# Altium PCB Microscope_Lamp.PcbDoc
Units mm, origin at the board's own origin, x right, y up, seen from the top; angles counter-clockwise.
Board outline 100 x 100 mm, 2 copper layers (Top Layer, Bottom Layer), stack 1.621 mm thick; 45 components, 38 nets, 209 pads, 36 vias.
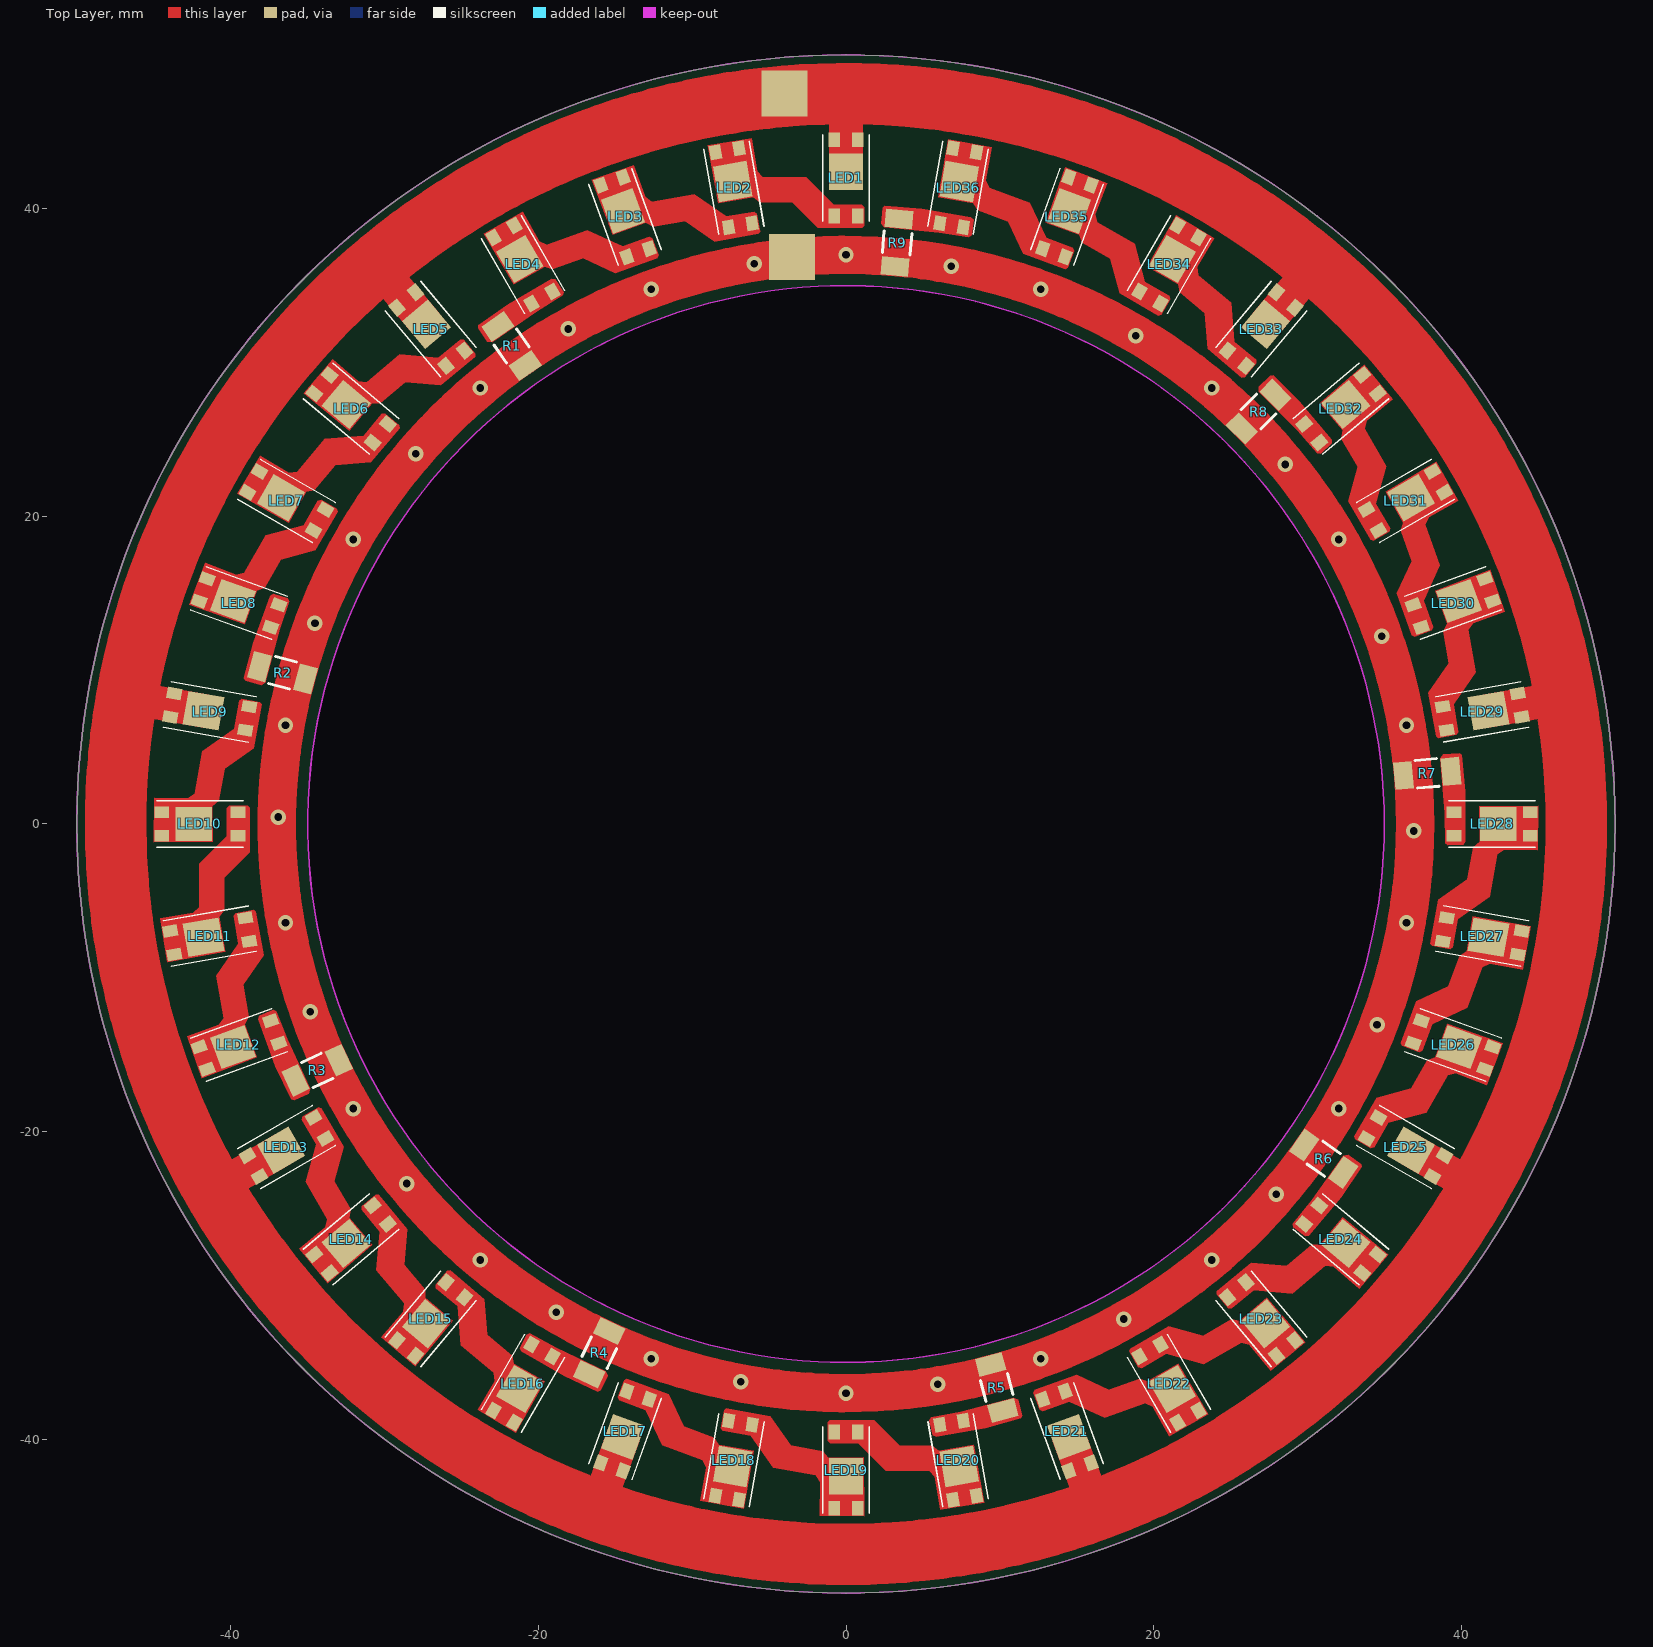
[diagram p0: Top Layer view]
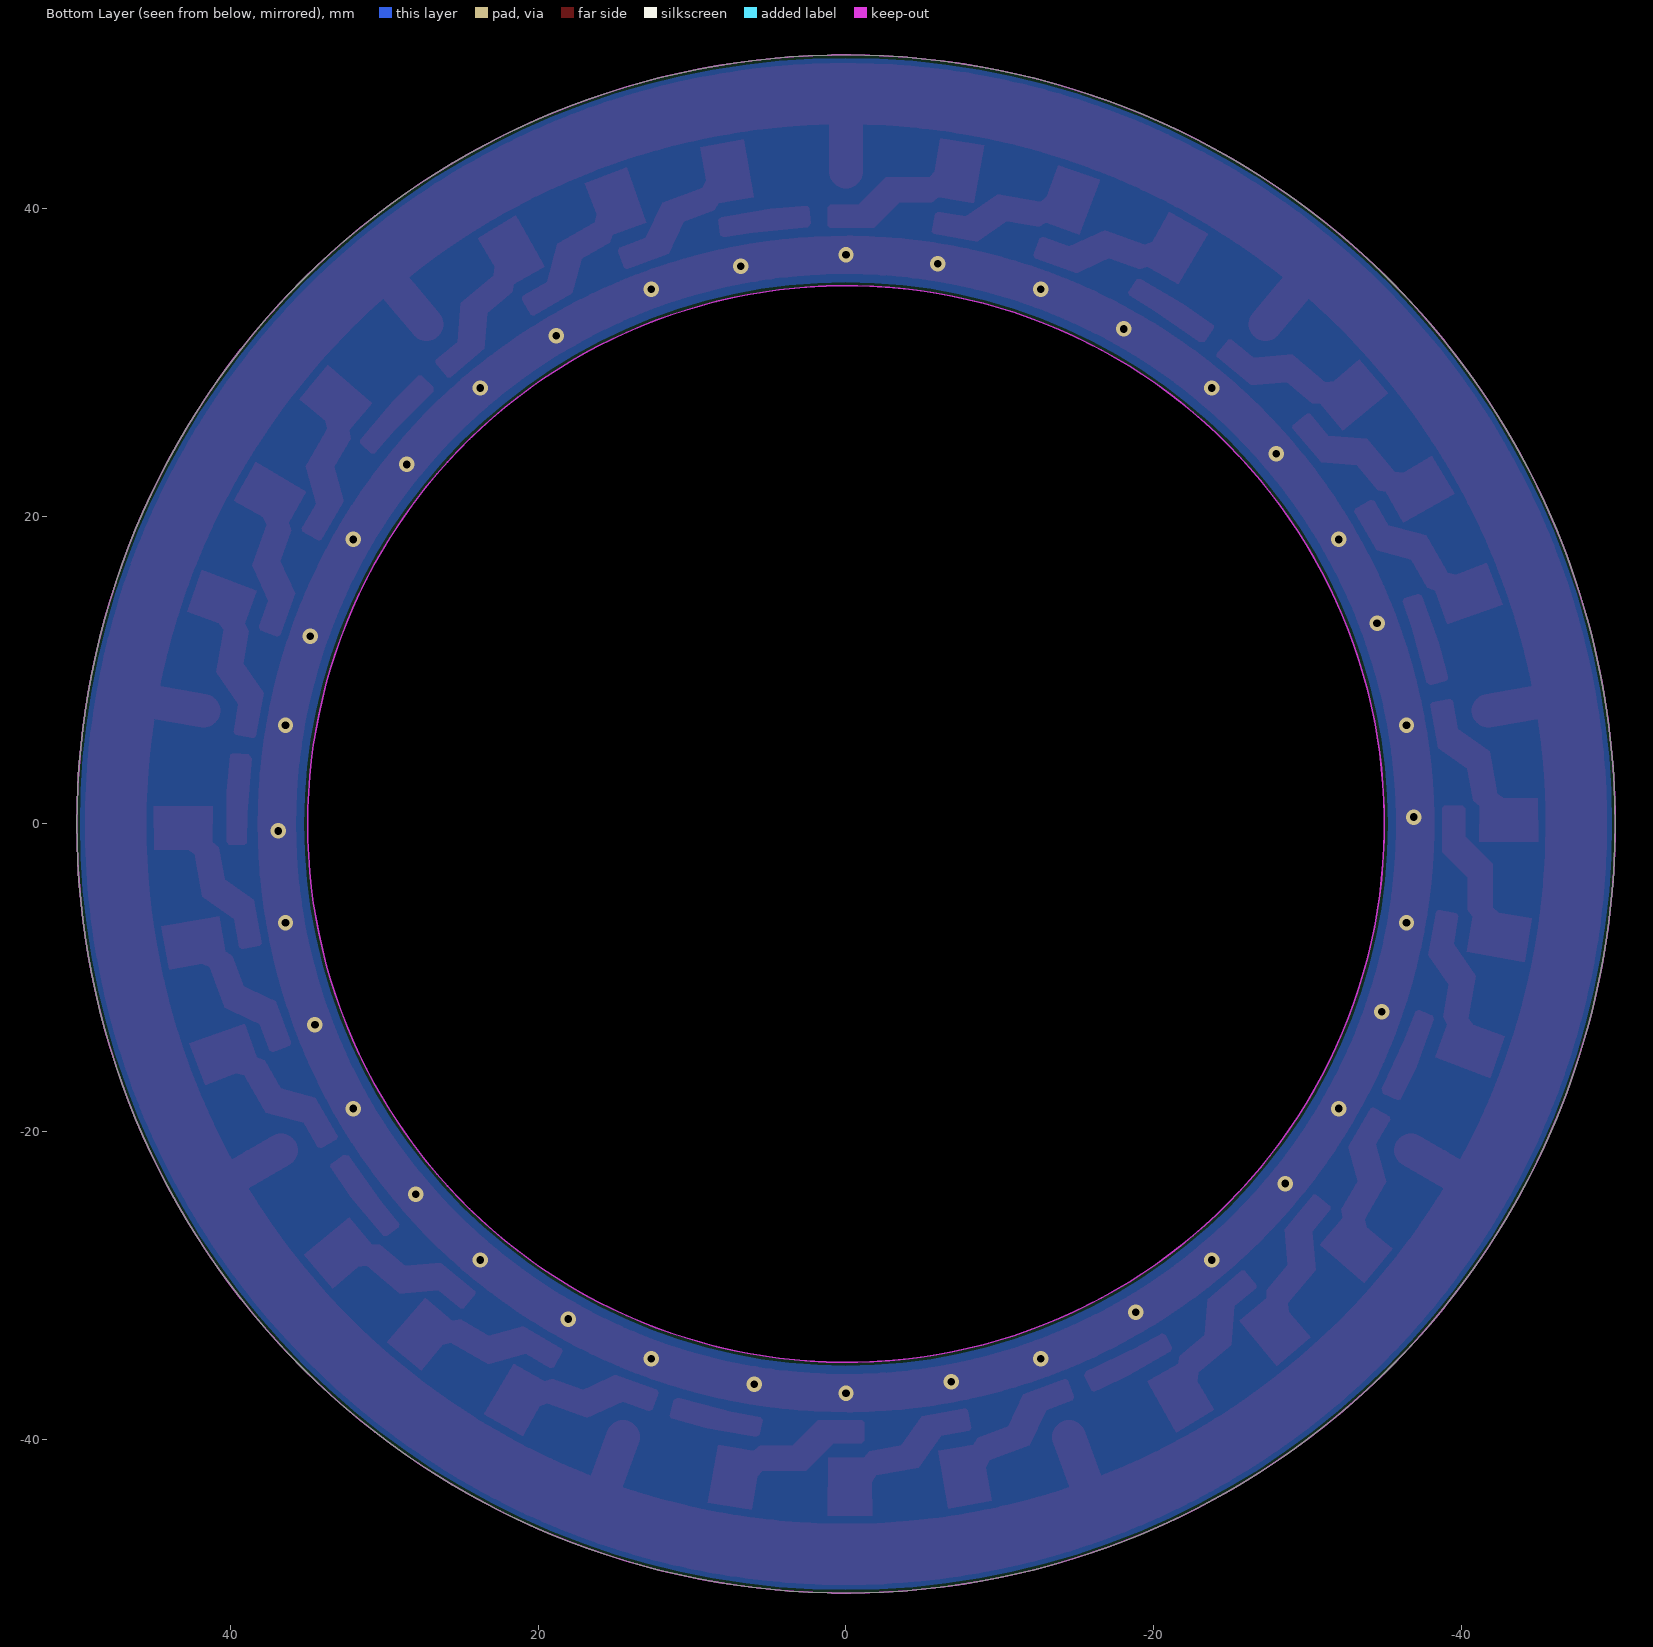
[diagram p1: Bottom Layer view, seen from below]
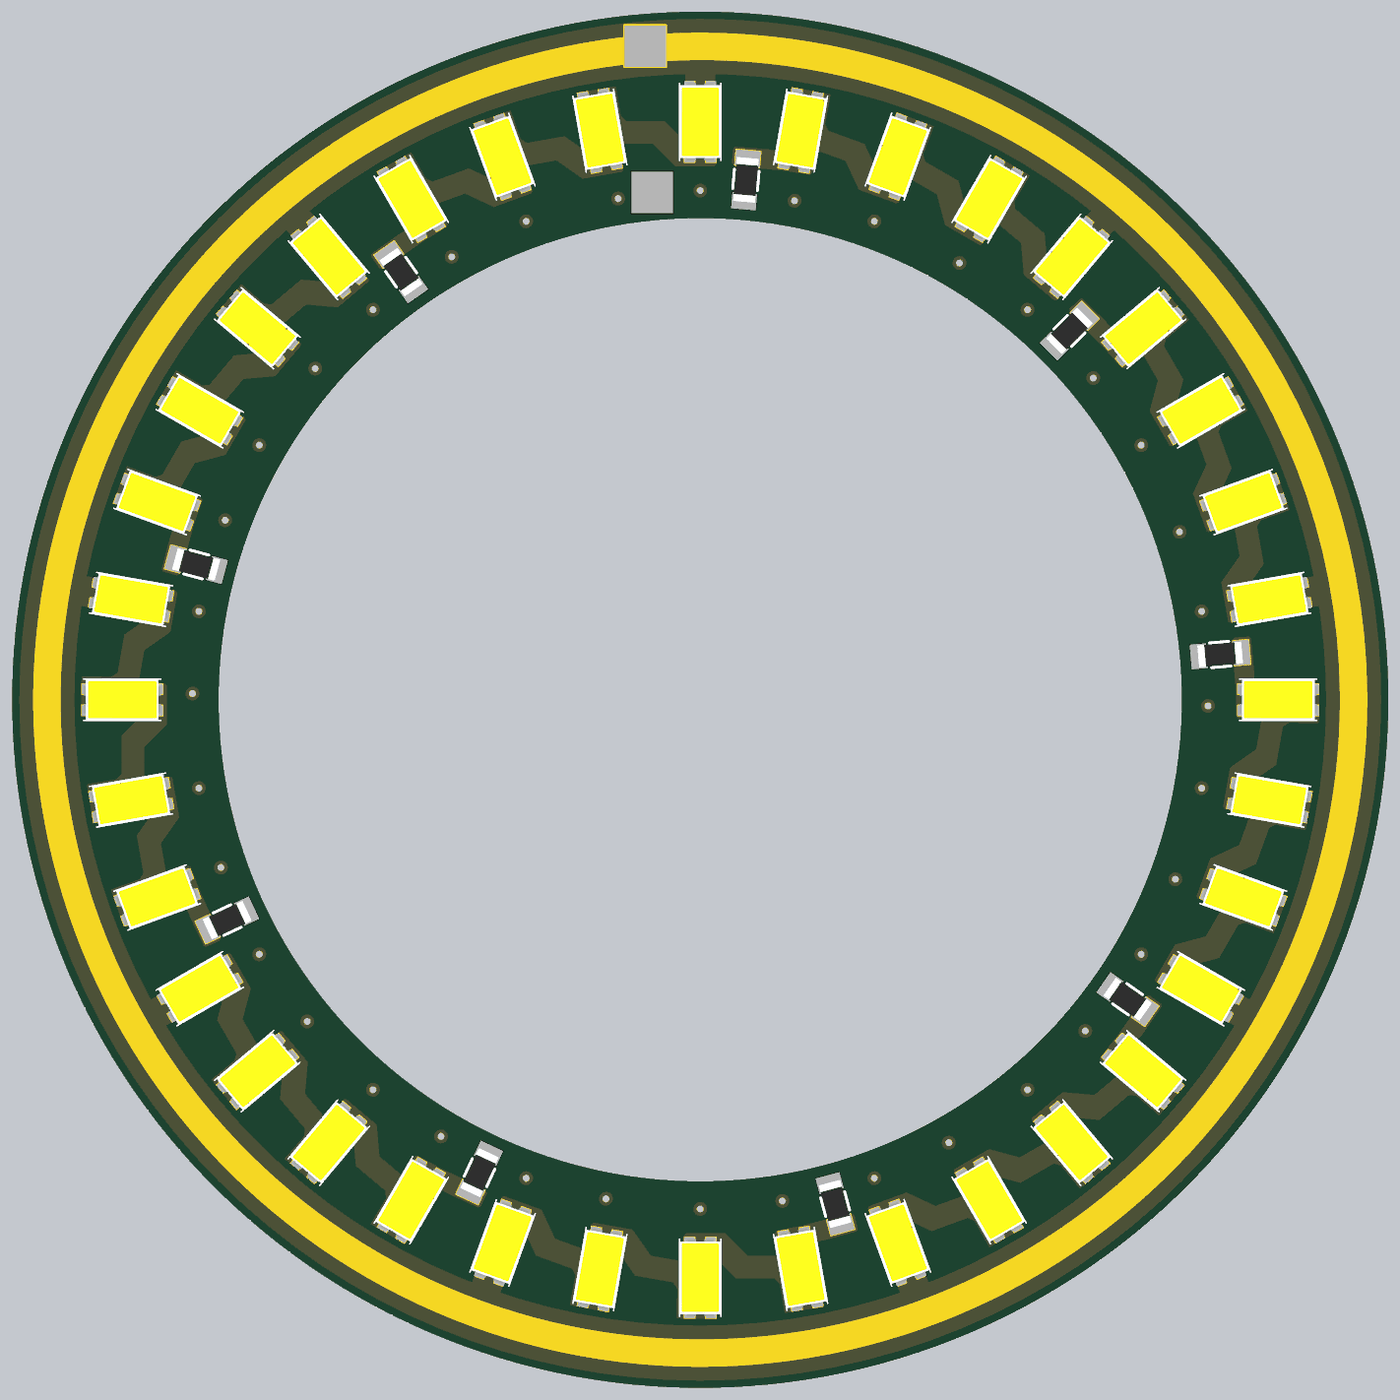
[diagram p2: 3D render of the assembled board from above, using the file's embedded part models]

## Layer stack, top to bottom
Top Solder: solder mask 0.0102, Solder Resist, Dk 3.5
Top Layer: signal copper 0.0356
Dielectric 1: dielectric 1.55, FR-4, Dk 4.8
Bottom Layer: signal copper 0.0356
Bottom Solder: solder mask 0.0102, Solder Resist, Dk 3.5

## Board outline
-50,0 ccw(c0,0) 0,-50 ccw(c0,0) 50,0 ccw(c0,0) 0,50 ccw(c0,0)
cut-out: -35,0 ccw(c0,0) 0,-35 ccw(c0,0) 35,0 ccw(c0,0) 0,35 ccw(c0,0)

## Design rules (kind name [scope] priority, off if disabled: settings)
Clearance [All] p1: gap=0.154 ignorepadtopadclearanceinfootprint=FALSE
PolygonConnect [All] p1: connectstyle=Relief reliefconductorwidth=0.254 reliefentries=4 polygonreliefangle="90 Angle" airgapwidth=0.254
RoutingVias [All] p1: holewidth=0.5 width=1 viastyle="Through Hole" minholewidth=0.5 minwidth=1 maxholewidth=0.5 maxwidth=1
SolderMaskExpansion [All] p1: expansion=0.102
Width [All] p1 off: maxlimit=0.254 minlimit=0.254 preferedwidth=0.254
30 further rules are at their usual default settings.

## Components (designator, comment, footprint, x,y, rotation, side; value= is the part's Value field where it differs from the comment)
LED1 "LG INNOTEK" LED_5630 0,42 r270 top
LED2 "LG INNOTEK" LED_5630 -7.293,41.362 r280 top
LED3 "LG INNOTEK" LED_5630 -14.365,39.467 r290 top
LED4 "LG INNOTEK" LED_5630 -21,36.373 r300 top
LED5 "LG INNOTEK" LED_5630 -26.997,32.174 r310 top
LED6 "LG INNOTEK" LED_5630 -32.174,26.997 r320 top
LED7 "LG INNOTEK" LED_5630 -36.373,21 r330 top
LED8 "LG INNOTEK" LED_5630 -39.467,14.365 r340 top
LED9 "LG INNOTEK" LED_5630 -41.362,7.293 r350 top
LED10 "LG INNOTEK" LED_5630 -42,0 r0 top
LED11 "LG INNOTEK" LED_5630 -41.362,-7.293 r10 top
LED12 "LG INNOTEK" LED_5630 -39.467,-14.365 r20 top
LED13 "LG INNOTEK" LED_5630 -36.373,-21 r30 top
LED14 "LG INNOTEK" LED_5630 -32.174,-26.997 r40 top
LED15 "LG INNOTEK" LED_5630 -26.997,-32.174 r50 top
LED16 "LG INNOTEK" LED_5630 -21,-36.373 r60 top
LED17 "LG INNOTEK" LED_5630 -14.365,-39.467 r70 top
LED18 "LG INNOTEK" LED_5630 -7.293,-41.362 r80 top
LED19 "LG INNOTEK" LED_5630 0,-42 r90 top
LED20 "LG INNOTEK" LED_5630 7.293,-41.362 r100 top
LED21 "LG INNOTEK" LED_5630 14.365,-39.467 r110 top
LED22 "LG INNOTEK" LED_5630 21,-36.373 r120 top
LED23 "LG INNOTEK" LED_5630 26.997,-32.174 r130 top
LED24 "LG INNOTEK" LED_5630 32.174,-26.997 r140 top
LED25 "LG INNOTEK" LED_5630 36.373,-21 r150 top
LED26 "LG INNOTEK" LED_5630 39.467,-14.365 r160 top
LED27 "LG INNOTEK" LED_5630 41.362,-7.293 r170 top
LED28 "LG INNOTEK" LED_5630 42,0 r180 top
LED29 "LG INNOTEK" LED_5630 41.362,7.293 r190 top
LED30 "LG INNOTEK" LED_5630 39.467,14.365 r200 top
LED31 "LG INNOTEK" LED_5630 36.373,21 r210 top
LED32 "LG INNOTEK" LED_5630 32.174,26.997 r220 top
LED33 "LG INNOTEK" LED_5630 26.997,32.174 r230 top
LED34 "LG INNOTEK" LED_5630 21,36.373 r240 top
LED35 "LG INNOTEK" LED_5630 14.365,39.467 r250 top
LED36 "LG INNOTEK" LED_5630 7.293,41.362 r260 top
R1 "10R/3216" RES3216X07N -21.741,31.075 r305 top
R2 "10R/3216" RES3216X07N -36.63,9.83 r345 top
R3 "10R/3216" RES3216X07N -34.378,-16.015 r25 top
R4 "10R/3216" RES3216X07N -16.041,-34.366 r65 top
R5 "10R/3216" RES3216X07N 9.802,-36.637 r105 top
R6 "10R/3216" RES3216X07N 31.058,-21.765 r145 top
R7 "10R/3216" RES3216X07N 37.783,3.291 r185 top
R8 "10R/3216" RES3216X07N 26.828,26.807 r225 top
R9 "10R/3216" RES3216X07N 3.32,37.78 r265 top

## Footprints (in the part's own frame and the unit in brackets; to place one, negate y for a bottom-side part, rotate by r counter-clockwise, add the part's x,y. Pads: shape width x height; smd on the part's side, far side on the other; paste and mask are expansions set on the pad)
LED_5630 [mm] "LG-INNOTEK"
  rect 0.95x0.75 smd mask+0.05: 1(-2.475,-0.775) 1(-2.475,0.775) 2(2.475,-0.775) 2(2.475,0.775)
  rect 2.37x2.2 smd mask+0.05: 1(-0.415,0)
  silkscreen extent -2.8,-1.5 2.8,1.5, body extent -2.8,-1.5 2.8,1.5, height 0.86
RES3216X07N [mm] "Chip Resistor, 2-Leads, Body 3.20x1.60mm, IPC Medium Density"
  round 1 on Mech6: 0(0,0)
  rect 1.2x1.8 smd mask+0.05: 1(-1.55,0) 2(1.55,0)
  silkscreen extent -0.7,-0.9 0.7,0.9, body extent -1.6,-0.8 1.6,0.8, height 0.6

## Part data
LED1 LED2 LED3 LED4 LED5 LED6 LED7 LED8 LED9 LED10 LED11 LED12 LED13 LED14 LED15 LED16 LED17 LED18 LED19 LED20 LED21 LED22 LED23 LED24 LED25 LED26 LED27 LED28 LED29 LED30 LED31 LED32 LED33 LED34 LED35 LED36: library part LED1, "Typical RED GaAs LED"
R1 R2 R3 R4 R5 R6 R7 R8 R9: library part Res1, "Resistor"

## Free pads (board coordinates)
  rect 3x3 smd: 1(-4,47.5) 1(-3.5,36.87)

## Via types
v1: diameter 1, hole 0.5, Top Layer to Bottom Layer, tented both sides, 36 vias

## Nets (pads, with @x,y where several pads share a name; then routed paths per layer and width w, separated by ;. In a path a pad name is that pad's centre, name@x,y a point inside that pad or via, vN(x,y) a via of type N, cw(c..) or ccw(c..) an arc to the next point about the centre after c; other vN are vias at no path point)
+vcc: LED1.1 LED5.1 LED9.1 LED13.1 LED17.1 LED21.1 LED25.1 LED29.1 LED33.1 pad.1@-4,47.5 | length 341.8
  Top Layer w2.2: -46.493,8.198 -43.8,7.723 LED9.1@-41.771,7.365 ; -40.885,-23.605 -38.517,-22.238 LED13.1@-36.732,-21.207 ; -30.346,36.165 -28.588,34.07 LED5.1@-27.264,32.492 ; -16.147,-44.363 -15.211,-41.793 LED17.1@-14.507,-39.857 ; LED1.1@0,42.415 0,44.475 0,47.21 ; LED21.1@14.507,-39.857 15.211,-41.793 16.147,-44.363 ; LED33.1@27.264,32.492 28.588,34.07 30.346,36.165 ; 30.579,36.322 30.82,36.6 ; LED25.1@36.732,-21.208 38.517,-22.238 40.885,-23.605 ; LED29.1@41.771,7.365 43.8,7.723 46.493,8.198
  Top Layer w4: 30.579,36.322 ccw(c0,0) 47.48,0 ccw(c0,0) 30.579,36.322
GND: pad.1@-3.5,36.87 R1.2 R2.2 R3.2 R4.2 R5.2 R6.2 R7.2 R8.2 R9.2 | length 232.5
  Top Layer w2.5: v1@37,0 ccw(c0,0) v1@37,0
  other v1: 0,-37 5.965,-36.421 -6.852,-36.265 -12.655,-34.769 12.655,-34.769 18.062,-32.185 -18.842,-31.734 -23.783,-28.344 23.783,-28.344 27.981,-24.066 -28.559,-23.376 -32.043,-18.5 32.043,-18.5 34.524,-13.045 -34.832,-12.199 -36.438,-6.425 36.438,-6.425 36.904,-0.45 -36.904,0.45 -36.438,6.425 36.438,6.425 34.832,12.199 -34.524,13.045 -32.043,18.5 32.043,18.5 28.559,23.376 -27.981,24.066 -23.783,28.344 23.783,28.344 18.842,31.734 -18.062,32.185 -12.655,34.769 12.655,34.769 6.852,36.265 -5.965,36.421 0,37
NetLED1_2: LED1.2 LED2.1
NetLED2_2: LED2.2 LED3.1
NetLED3_2: LED3.2 LED4.1
NetLED4_2: LED4.2 R1.1
NetLED5_2: LED5.2 LED6.1
NetLED6_2: LED6.2 LED7.1
NetLED7_2: LED7.2 LED8.1
NetLED8_2: LED8.2 R2.1
NetLED9_2: LED9.2 LED10.1
NetLED10_2: LED10.2 LED11.1
NetLED11_2: LED11.2 LED12.1
NetLED12_2: LED12.2 R3.1
NetLED13_2: LED13.2 LED14.1
NetLED14_2: LED14.2 LED15.1
NetLED15_2: LED15.2 LED16.1
NetLED16_2: LED16.2 R4.1
NetLED17_2: LED17.2 LED18.1
NetLED18_2: LED18.2 LED19.1
NetLED19_2: LED19.2 LED20.1
NetLED20_2: LED20.2 R5.1
NetLED21_2: LED21.2 LED22.1
NetLED22_2: LED22.2 LED23.1
NetLED23_2: LED23.2 LED24.1
NetLED24_2: LED24.2 R6.1
NetLED25_2: LED25.2 LED26.1
NetLED26_2: LED26.2 LED27.1
NetLED27_2: LED27.2 LED28.1
NetLED28_2: LED28.2 R7.1
NetLED29_2: LED29.2 LED30.1
NetLED30_2: LED30.2 LED31.1
NetLED31_2: LED31.2 LED32.1
NetLED32_2: LED32.2 R8.1
NetLED33_2: LED33.2 LED34.1
NetLED34_2: LED34.2 LED35.1
NetLED35_2: LED35.2 LED36.1
NetLED36_2: LED36.2 R9.1
pads on no net: R1.0 R2.0 R3.0 R4.0 R5.0 R6.0 R7.0 R8.0 R9.0

## Polygon pours and split planes (outlines as drawn)
GND on Bottom Layer "Bottom Layer-GND" (solid, pour order 0): -50,0 ccw(c0,0) 0,-50 ccw(c0,0) 50,0 ccw(c0,0) 0,50 ccw(c0,0)

## Keep-outs
Keep-Out Layer:
  circle w0.1: c0,0 r35
  circle w0.1: c0,0 r50

## Other copper
Top Layer:
  region net NetLED32_2: 30.642,24.091 29.357,25.559 26.842,28.1 26.829,28.411 27.582,29.137 27.772,29.161 29.473,27.486 31.572,24.993 31.593,24.754 30.864,24.084
  region net NetLED28_2: 38.959,-1.242 38.918,0.709 38.625,4.272 38.815,4.519 39.858,4.591 40.019,4.487 40.245,2.111 40.251,-1.148 40.113,-1.345 39.124,-1.389
  region net NetLED24_2: 29.046,-25.993 30.269,-24.473 32.334,-21.555 32.639,-21.488 33.484,-22.103 33.541,-22.286 32.186,-24.252 30.096,-26.752 29.864,-26.814 29.078,-26.213
  region net NetLED20_2: 5.542,-38.582 7.456,-38.204 10.914,-37.296 11.19,-37.441 11.443,-38.456 11.368,-38.632 9.067,-39.267 5.859,-39.839 5.641,-39.737 5.426,-38.771
  region net NetLED8_2: -36.184,14.492 -36.814,12.645 -37.757,9.196 -38.02,9.029 -39.025,9.318 -39.14,9.47 -38.54,11.781 -37.431,14.845 -37.234,14.983 -36.29,14.687
  region net NetLED16_2: -20.555,-33.118 -18.845,-34.059 -15.613,-35.586 -15.494,-35.874 -15.953,-36.814 -16.123,-36.901 -18.295,-35.908 -21.12,-34.284 -21.221,-34.066 -20.765,-33.188
  region net NetLED12_2: -37.034,-12.158 -36.329,-13.977 -34.834,-17.225 -34.929,-17.522 -35.884,-17.947 -36.071,-17.904 -37.096,-15.748 -38.216,-12.688 -38.154,-12.456 -37.24,-12.076
  region net NetLED4_2: -18.404,34.36 -20.073,33.35 -23.012,31.314 -23.321,31.355 -23.905,32.223 -23.896,32.414 -21.95,33.798 -19.131,35.432 -18.892,35.411 -18.359,34.577
  region net NetLED36_2: 7.988,38.151 6.06,38.45 2.5,38.78 2.29,39.01 2.4,40.05 2.53,40.19 4.91,40 8.12,39.44 8.29,39.27 8.162,38.289
  region net NetLED33_2: 19.586,36.239 21.588,35.094 21.685,34.555 23.309,33.193 23.511,30.882 25.733,29.018 25.916,29.034 26.681,29.946 26.661,30.171 25.252,31.354 25.031,33.876 22.886,35.676 22.839,36.211 23.951,38.091 21.467,39.569
  region net NetLED34_2: 12.996,39.089 15.167,38.309 15.355,37.796 17.191,36.736 17.792,34.496 20.303,33.046 20.481,33.093 21.076,34.124 21.017,34.343 19.424,35.263 18.768,37.708 16.343,39.108 16.204,39.627 16.972,41.671 14.269,42.695
  region net NetLED35_2: 6.01,40.752 8.284,40.361 8.559,39.888 10.551,39.163 11.531,37.061 14.256,36.069 14.423,36.147 14.83,37.265 14.734,37.47 13.005,38.1 11.935,40.394 9.304,41.352 9.077,41.839 9.478,43.985 6.639,44.525
  region net NetLED29_2: 38.297,15.171 39.095,13.006 38.824,12.532 39.192,10.444 37.861,8.544 38.365,5.688 38.516,5.583 39.688,5.79 39.817,5.975 39.498,7.787 40.95,9.861 40.464,12.618 40.772,13.058 42.831,13.784 41.879,16.513
  region net NetLED30_2: 35.081,21.591 36.243,19.598 36.058,19.083 36.783,17.091 35.803,14.989 36.794,12.264 36.961,12.186 38.079,12.593 38.175,12.798 37.546,14.527 38.615,16.822 37.658,19.453 37.885,19.94 39.787,21.012 38.375,23.534
  region net NetLED31_2: 30.799,27.354 32.289,25.593 32.196,25.055 33.256,23.219 32.656,20.978 34.106,18.467 34.283,18.419 35.314,19.014 35.373,19.233 34.453,20.826 35.108,23.272 33.708,25.697 33.847,26.216 35.534,27.602 33.705,29.841
  region net NetLED25_2: 39.089,-12.996 38.309,-15.167 37.796,-15.355 36.736,-17.191 34.496,-17.792 33.046,-20.303 33.093,-20.481 34.124,-21.076 34.343,-21.017 35.263,-19.424 37.708,-18.768 39.108,-16.343 39.627,-16.204 41.671,-16.972 42.695,-14.269
  region net NetLED26_2: 40.752,-6.01 40.361,-8.284 39.888,-8.559 39.163,-10.551 37.061,-11.531 36.069,-14.256 36.147,-14.423 37.265,-14.83 37.47,-14.734 38.1,-13.005 40.394,-11.935 41.352,-9.304 41.839,-9.077 43.985,-9.478 44.525,-6.639
  region net NetLED27_2: 41.177,1.157 41.186,-1.149 40.769,-1.502 40.4,-3.59 38.501,-4.92 37.997,-7.776 38.102,-7.927 39.274,-8.133 39.46,-8.004 39.779,-6.192 41.853,-4.74 42.339,-1.982 42.779,-1.674 44.963,-1.697 45.001,1.194
  region net NetLED21_2: 21.591,-35.081 19.598,-36.243 19.083,-36.058 17.091,-36.783 14.989,-35.803 12.264,-36.794 12.186,-36.961 12.593,-38.079 12.798,-38.175 14.527,-37.546 16.822,-38.615 19.453,-37.658 19.94,-37.885 21.012,-39.787 23.534,-38.375
  region net NetLED22_2: 27.354,-30.799 25.593,-32.289 25.055,-32.196 23.219,-33.256 20.978,-32.656 18.467,-34.106 18.419,-34.283 19.014,-35.314 19.233,-35.373 20.826,-34.453 23.272,-35.108 25.697,-33.708 26.216,-33.847 27.602,-35.534 29.841,-33.705
  region net NetLED23_2: 32.287,-25.581 30.812,-27.354 30.265,-27.356 28.641,-28.719 26.33,-28.517 24.109,-30.381 24.093,-30.564 24.858,-31.476 25.083,-31.495 26.493,-30.313 29.015,-30.533 31.159,-28.733 31.695,-28.78 33.353,-30.201 35.24,-28.012
  region net NetLED17_2: -6.01,-40.752 -8.284,-40.361 -8.559,-39.888 -10.551,-39.163 -11.531,-37.061 -14.256,-36.069 -14.423,-36.147 -14.83,-37.265 -14.734,-37.47 -13.005,-38.1 -11.935,-40.394 -9.304,-41.352 -9.077,-41.839 -9.478,-43.985 -6.639,-44.525
  region net NetLED18_2: 1.157,-41.177 -1.149,-41.186 -1.502,-40.769 -3.59,-40.4 -4.92,-38.501 -7.776,-37.997 -7.927,-38.102 -8.133,-39.274 -8.004,-39.46 -6.192,-39.779 -4.74,-41.853 -1.982,-42.339 -1.674,-42.779 -1.697,-44.963 1.194,-45.001
  region net NetLED19_2: 8.29,-40.35 6.02,-40.76 5.6,-40.41 3.48,-40.41 1.84,-38.77 -1.06,-38.77 -1.19,-38.9 -1.19,-40.09 -1.03,-40.25 0.81,-40.25 2.6,-42.04 5.4,-42.04 5.78,-42.42 6.137,-44.574 8.99,-44.11
  region net NetLED13_2: -30.799,-27.354 -32.289,-25.593 -32.196,-25.055 -33.256,-23.219 -32.656,-20.978 -34.106,-18.467 -34.283,-18.419 -35.314,-19.014 -35.373,-19.233 -34.453,-20.826 -35.108,-23.272 -33.708,-25.697 -33.847,-26.216 -35.534,-27.602 -33.705,-29.841
  region net NetLED14_2: -25.581,-32.287 -27.354,-30.812 -27.356,-30.265 -28.719,-28.641 -28.517,-26.33 -30.381,-24.109 -30.564,-24.093 -31.476,-24.858 -31.495,-25.083 -30.313,-26.493 -30.533,-29.015 -28.733,-31.159 -28.78,-31.695 -30.201,-33.353 -28.012,-35.24
  region net NetLED15_2: -19.586,-36.239 -21.588,-35.094 -21.685,-34.555 -23.309,-33.193 -23.511,-30.882 -25.733,-29.018 -25.916,-29.034 -26.681,-29.946 -26.661,-30.171 -25.252,-31.354 -25.031,-33.876 -22.886,-35.676 -22.839,-36.211 -23.951,-38.091 -21.467,-39.569
  region net NetLED9_2: -41.177,-1.157 -41.186,1.149 -40.769,1.502 -40.4,3.59 -38.501,4.92 -37.997,7.776 -38.102,7.927 -39.274,8.133 -39.46,8.004 -39.779,6.192 -41.853,4.74 -42.339,1.982 -42.779,1.674 -44.963,1.697 -45.001,-1.194
  region net NetLED10_2: -40.35,-8.29 -40.76,-6.02 -40.41,-5.6 -40.41,-3.48 -38.77,-1.84 -38.77,1.06 -38.9,1.19 -40.09,1.19 -40.25,1.03 -40.25,-0.81 -42.04,-2.6 -42.04,-5.4 -42.42,-5.78 -44.574,-6.137 -44.11,-8.99
  region net NetLED11_2: -38.297,-15.171 -39.095,-13.006 -38.824,-12.532 -39.192,-10.444 -37.861,-8.544 -38.365,-5.688 -38.516,-5.583 -39.688,-5.79 -39.817,-5.975 -39.498,-7.787 -40.95,-9.861 -40.464,-12.618 -40.772,-13.058 -42.831,-13.784 -41.879,-16.513
  region net NetLED5_2: -32.287,25.581 -30.812,27.354 -30.265,27.356 -28.641,28.719 -26.33,28.517 -24.109,30.381 -24.093,30.564 -24.858,31.476 -25.083,31.495 -26.493,30.313 -29.015,30.533 -31.159,28.733 -31.695,28.78 -33.353,30.201 -35.24,28.012
  region net NetLED6_2: -36.239,19.586 -35.094,21.588 -34.555,21.685 -33.193,23.309 -30.882,23.511 -29.018,25.733 -29.034,25.916 -29.946,26.681 -30.171,26.661 -31.354,25.252 -33.876,25.031 -35.676,22.886 -36.211,22.839 -38.091,23.951 -39.569,21.467
  region net NetLED7_2: -39.089,12.996 -38.309,15.167 -37.796,15.355 -36.736,17.191 -34.496,17.792 -33.046,20.303 -33.093,20.481 -34.124,21.076 -34.343,21.017 -35.263,19.424 -37.708,18.768 -39.108,16.343 -39.627,16.204 -41.671,16.972 -42.695,14.269
  region net NetLED3_2: -21.591,35.081 -19.598,36.243 -19.083,36.058 -17.091,36.783 -14.989,35.803 -12.264,36.794 -12.186,36.961 -12.593,38.079 -12.798,38.175 -14.527,37.546 -16.822,38.615 -19.453,37.658 -19.94,37.885 -21.012,39.787 -23.534,38.375
  region net NetLED2_2: -15.171,38.297 -13.006,39.095 -12.532,38.824 -10.444,39.192 -8.544,37.861 -5.688,38.365 -5.583,38.516 -5.79,39.688 -5.975,39.817 -7.787,39.498 -9.861,40.95 -12.618,40.464 -13.058,40.772 -13.784,42.831 -16.513,41.879
  region net NetLED1_2: -8.29,40.35 -6.02,40.76 -5.6,40.41 -3.48,40.41 -1.84,38.77 1.06,38.77 1.19,38.9 1.19,40.09 1.03,40.25 -0.81,40.25 -2.6,42.04 -5.4,42.04 -5.78,42.42 -6.137,44.574 -8.99,44.11

## Silkscreen, mask and mechanical layers (free items; w line width, h text height)
Top Solder:
  lines w2: 30.579,36.322 cw(c0,0) 47.48,0 cw(c0,0) 30.579,36.322
Drill Drawing:
  lines w0.1: -0.5,0 0,0 0,-0.5